# Altium PCB DCcom0038.PcbDoc
Units mm, origin at the board's own origin, x right, y up, seen from the top; angles counter-clockwise.
Board outline 20 x 20 mm, 2 copper layers (Top Layer, Bottom Layer), stack 1.021 mm thick; 13 components, 8 nets, 30 pads, 95 vias.
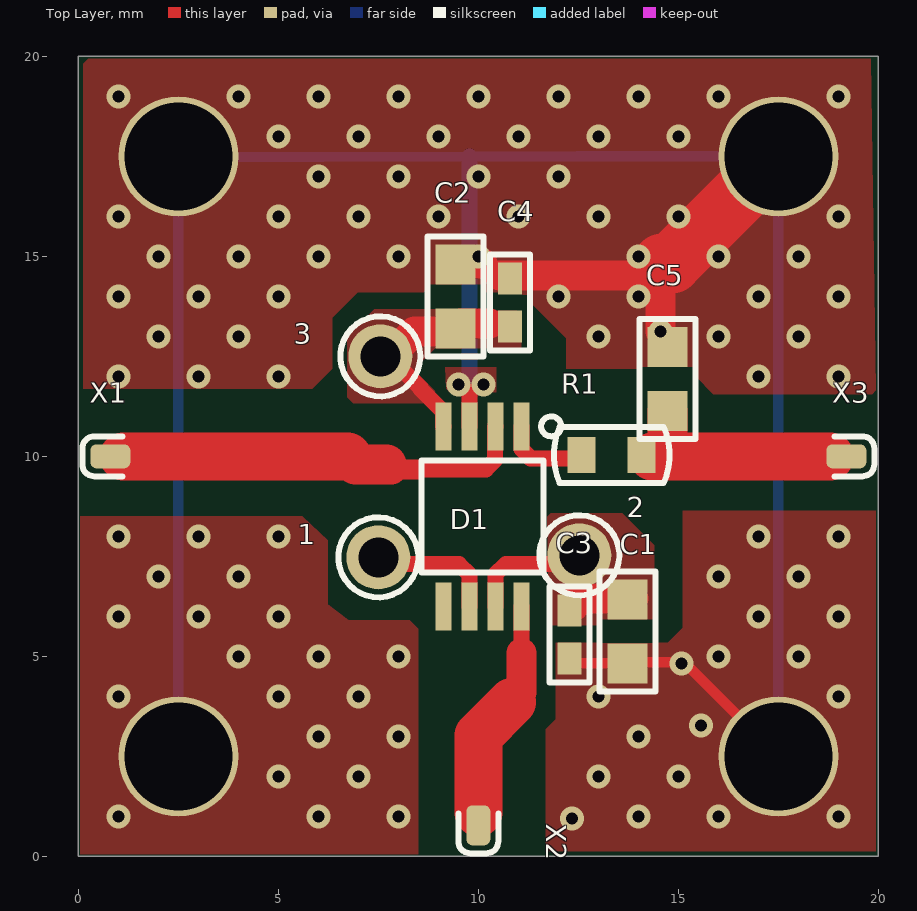
[diagram p0: Top Layer view]
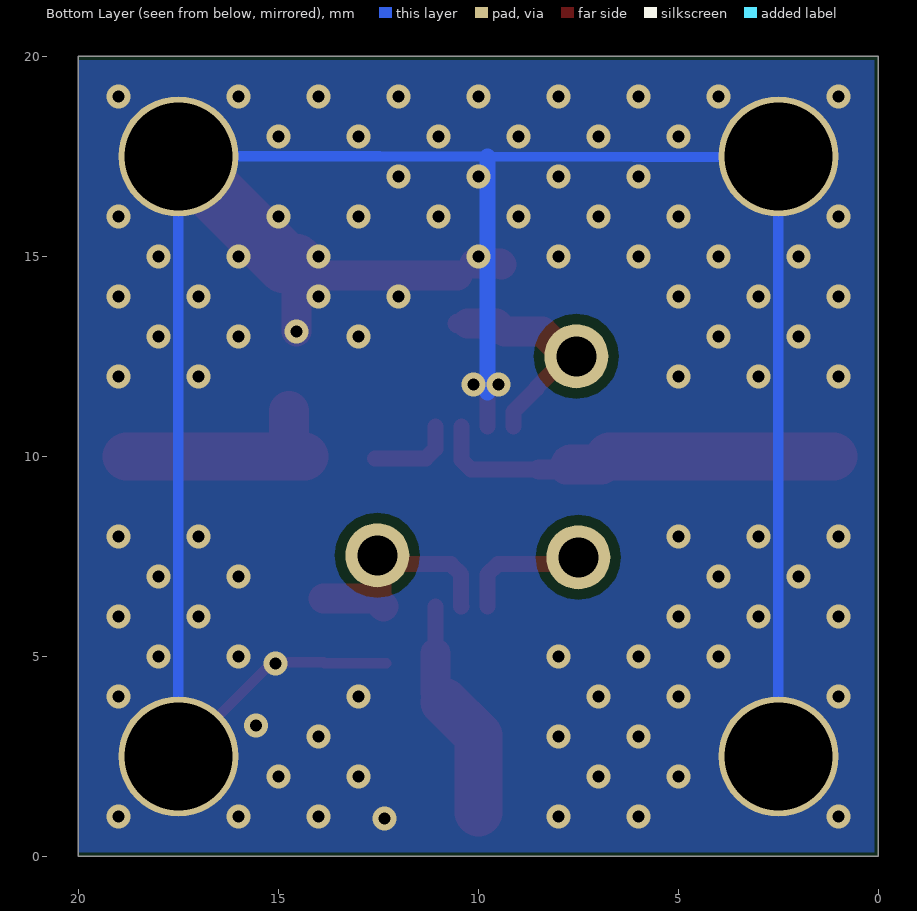
[diagram p1: Bottom Layer view, seen from below]

## Layer stack, top to bottom
Top Solder: solder mask 0.0102, Solder Resist, Dk 3.5
Top Layer: signal copper 0.0356
Dielectric 1: dielectric 0.95, FR-4, Dk 4.8
Bottom Layer: signal copper 0.0356
Bottom Solder: solder mask 0.0102, Solder Resist, Dk 3.5

## Board outline
0,0 0,20 20,20 20,0

## Design rules (kind name [scope] priority, off if disabled: settings)
AssemblyTestPointUsage AssemblyTestPointUsage_1 [All] p2:
AssemblyTestpoint AssemblyTestpoint_1 [All] p2: testpointundercomponent=TRUE minsize=1.016 maxsize=2.54 preferedsize=1.524 minholesize=0 maxholesize=1.016 preferedholesize=0.813 testpointgrid=0.025 usegrid=TRUE gridtolerance=0 allowsidetop=TRUE allowsidebottom=TRUE
Clearance [All] p1: gap=0.254 ignorepadtopadclearanceinfootprint=FALSE except(0: Arc-Hole Track-Hole SMDPad-Hole THPad-Hole Via-Hole Fill-Hole Poly-Hole Region-Hole Text-Hole; 0.127: SMDPad-SMDPad)
Clearance Clearance_1 [All] p2: gap=0.254 ignorepadtopadclearanceinfootprint=FALSE except(0: Arc-Hole Track-Hole SMDPad-Hole THPad-Hole Via-Hole Fill-Hole Poly-Hole Region-Hole Text-Hole; 0.1: SMDPad-Poly SMDPad-Region THPad-Poly THPad-Region; 0.15: Track-Track Track-SMDPad SMDPad-SMDPad SMDPad-THPad SMDPad-Via THPad-THPad)
ComponentClearance ComponentClearance_1 [All] p2: gap=0.254 collisioncheckmode=3 verticalgap=0.254 showdistances=FALSE
DiffPairsRouting [All] p1: maxlimit=0.254 minlimit=0.254 mostfreqgap=0.254 substack1={E3139BEB-1D26-4D56-B641-86937DF22D5B} toplayer_{e3139beb-1d26-4d56-b641-86937df22d5b}_minwidth=0.381 toplayer_{e3139beb-1d26-4d56-b641-86937df22d5b}_maxwidth=0.381 toplayer_{e3139beb-1d26-4d56-b641-86937df22d5b}_prefwidth=0.381 bottomlayer_{e3139beb-1d26-4d56-b641-86937df22d5b}_minwidth=0.381 bottomlayer_{e3139beb-1d26-4d56-b641-86937df22d5b}_maxwidth=0.381 bottomlayer_{e3139beb-1d26-4d56-b641-86937df22d5b}_prefwidth=0.381 toplayer_minwidth=0.381 toplayer_maxwidth=0.381 toplayer_prefwidth=0.381 bottomlayer_minwidth=0.381 bottomlayer_maxwidth=0.381 bottomlayer_prefwidth=0.381 maxuncoupledlength=12.7
DiffPairsRouting DiffPairsRouting_1 [All] p2: maxlimit=0.254 minlimit=0.254 mostfreqgap=0.254 substack1={E3139BEB-1D26-4D56-B641-86937DF22D5B} toplayer_{e3139beb-1d26-4d56-b641-86937df22d5b}_minwidth=0.381 toplayer_{e3139beb-1d26-4d56-b641-86937df22d5b}_maxwidth=0.381 toplayer_{e3139beb-1d26-4d56-b641-86937df22d5b}_prefwidth=0.381 bottomlayer_{e3139beb-1d26-4d56-b641-86937df22d5b}_minwidth=0.381 bottomlayer_{e3139beb-1d26-4d56-b641-86937df22d5b}_maxwidth=0.381 bottomlayer_{e3139beb-1d26-4d56-b641-86937df22d5b}_prefwidth=0.381 toplayer_minwidth=0.381 toplayer_maxwidth=0.381 toplayer_prefwidth=0.381 bottomlayer_minwidth=0.381 bottomlayer_maxwidth=0.381 bottomlayer_prefwidth=0.381 maxuncoupledlength=12.7
FabricationTestPointUsage FabricationTestPointUsage_1 [All] p2: valid=0 allowmultiple=FALSE
FabricationTestpoint FabricationTestpoint_1 [All] p2: side=3 testpointundercomponent=TRUE minsize=1.016 maxsize=2.54 preferedsize=1.524 minholesize=0 maxholesize=1.016 preferedholesize=0.813 testpointgrid=0.025 allowsidetop=TRUE allowsidebottom=TRUE usegrid=TRUE gridtolerance=0
FanoutControl Fanout_LCC [IsLCC] p1: bgadir=Out bgaviamode=Centered fanoutstyle=Auto fanoutdirection=Alternating viagrid=0.025 // Fanout_LCC (Default Rule)
FanoutControl Fanout_BGA [IsBGA] p2: bgadir=Out bgaviamode=Centered fanoutstyle=Auto fanoutdirection=Alternating viagrid=0.025 // Fanout_BGA (Default Rule)
FanoutControl Fanout_Small [(CompPinCount < 5)] p3: bgadir=Out bgaviamode=Centered fanoutstyle=Auto fanoutdirection=OutThenIn viagrid=0.025 // Fanout_Small (Default Rule)
FanoutControl Fanout_SOIC [IsSOIC] p4: bgadir=Out bgaviamode=Centered fanoutstyle=Auto fanoutdirection=Alternating viagrid=0.025 // Fanout_SOIC (Default Rule)
FanoutControl Fanout_BGA_1 [IsBGA] p6: bgadir=Out bgaviamode=Centered fanoutstyle=Auto fanoutdirection=Alternating viagrid=0.025 // Fanout_BGA (Default Rule)
FanoutControl Fanout_LCC_1 [IsLCC] p7: bgadir=Out bgaviamode=Centered fanoutstyle=Auto fanoutdirection=Alternating viagrid=0.025 // Fanout_LCC (Default Rule)
FanoutControl Fanout_SOIC_1 [IsSOIC] p8: bgadir=Out bgaviamode=Centered fanoutstyle=Auto fanoutdirection=Alternating viagrid=0.025 // Fanout_SOIC (Default Rule)
FanoutControl Fanout_Small_1 [(CompPinCount < 5)] p9: bgadir=Out bgaviamode=Centered fanoutstyle=Auto fanoutdirection=OutThenIn viagrid=0.025 // Fanout_Small (Default Rule)
FanoutControl Fanout_Default_1 [All] p10: bgadir=Out bgaviamode=Centered fanoutstyle=Auto fanoutdirection=Alternating viagrid=0.025 // Fanout_Default (Default Rule)
Height Height_1 [All] p2: minheight=0 maxheight=25.4 prefheight=12.7
HoleSize HoleSize_1 [All] p2: absolutevalues=TRUE maxlimit=2.54 minlimit=0.025 maxpercent=80.000 minpercent=20.000
HoleToHoleClearance HoleToHoleClearance_1 [All] p2: gap=0.254 allowstackedmicrovias=TRUE
LayerPairs LayerPairs_1 [All] p2: enforce=TRUE
MinimumSolderMaskSliver MinimumSolderMaskSliver_1 [All] p2: minsoldermaskwidth=0.254
NetAntennae NetAntennae_1 [All] p2: netantennaetolerance=0
PasteMaskExpansion PasteMaskExpansion_1 [All] p2: expansion=0
PlaneClearance PlaneClearance_1 [All] p2: clearance=0.8
PlaneConnect [All] p1: planeconnectstyle=Direct reliefexpansion=0.508 reliefentries=4 reliefconductorwidth=0.254 reliefairgap=0.254
PlaneConnect PlaneConnect_1 [All] p2: planeconnectstyle=Direct reliefexpansion=0.508 reliefentries=4 reliefconductorwidth=0.254 reliefairgap=0.254
PolygonConnect [All] p1: connectstyle=Direct reliefconductorwidth=0.254 reliefentries=4 polygonreliefangle="90 Angle" airgapwidth=0.254
PolygonConnect PolygonConnect_1 [All] p2: connectstyle=Direct reliefconductorwidth=0.254 reliefentries=4 polygonreliefangle="90 Angle" airgapwidth=0.254
RoutingCorners RoutingCorners_1 [All] p2: cornerstyle=45-Degree minsetback=2.54 maxsetback=2.54
RoutingLayers RoutingLayers_1 [All] p2: top layer_v5=TRUE bottom layer_v5=TRUE
RoutingPriority RoutingPriority_1 [All] p2: routingpriority=0
RoutingTopology RoutingTopology_1 [All] p2: topology=Shortest
RoutingVias [All] p1: holewidth=0.711 width=1.27 viastyle="Through Hole" minholewidth=0.711 minwidth=1.27 maxholewidth=0.711 maxwidth=1.27
RoutingVias RoutingVias_1 [All] p2: holewidth=0.711 width=1.27 viastyle="Through Hole" minholewidth=0.711 minwidth=1.27 maxholewidth=0.711 maxwidth=1.27
ShortCircuit ShortCircuit_1 [All] p2: allowed=FALSE
SilkToBoardRegionClearance SilkToBoardRegionClearance_1 [All] p2:
SilkToSilkClearance SilkToSilkClearance_1 [All] p2: silktosilkclearance=0.254
SilkToSolderMaskClearance SilkToSolderMaskClearance_1 [IsPad] p2: minsilkscreentomaskgap=0.254 clearancetoexposedcopper=TRUE
SolderMaskExpansion [All] p1: expansion=0.102 istentingtop=FALSE
SolderMaskExpansion SolderMaskExpansion_1 [All] p2: expansion=0.102 istentingtop=FALSE
UnRoutedNet UnRoutedNet_1 [All] p2:
UnpouredPolygon UnpouredPolygon_1 [All] p2:
Width [All] p1: maxlimit=1.5 minlimit=0.254 preferedwidth=0.4 substack1={E3139BEB-1D26-4D56-B641-86937DF22D5B} toplayer_{e3139beb-1d26-4d56-b641-86937df22d5b}_maxwidth=0.254 toplayer_{e3139beb-1d26-4d56-b641-86937df22d5b}_prefwidth=0.254 bottomlayer_{e3139beb-1d26-4d56-b641-86937df22d5b}_maxwidth=0.254 bottomlayer_{e3139beb-1d26-4d56-b641-86937df22d5b}_prefwidth=0.254
Width Width_08 [All] p2: maxlimit=0.8 minlimit=0.8 preferedwidth=0.8 substack1={E3139BEB-1D26-4D56-B641-86937DF22D5B}
Width Width_1 [All] p3: maxlimit=0.54 minlimit=0.254 preferedwidth=0.4 substack1={E3139BEB-1D26-4D56-B641-86937DF22D5B} toplayer_{e3139beb-1d26-4d56-b641-86937df22d5b}_maxwidth=0.254 toplayer_{e3139beb-1d26-4d56-b641-86937df22d5b}_prefwidth=0.254 bottomlayer_{e3139beb-1d26-4d56-b641-86937df22d5b}_maxwidth=0.254 bottomlayer_{e3139beb-1d26-4d56-b641-86937df22d5b}_prefwidth=0.254 checkconnectedcopper=TRUE
24 further rules are at their usual default settings.

## Components (designator, comment, footprint, x,y, rotation, side; value= is the part's Value field where it differs from the comment)
1 "TP" TP1 7.5,7.475 r90 top
2 "TP" TP1 12.525,7.525 r90 top
3 "TP" TP1 7.55,12.5 r90 top
C1 "0,1 мк" CAPC1608N 13.725,5.625 r90 top value={Value}
C2 "0,1 мк" CAPC1608N 9.425,14 r270 top value={Value}
C3 "100" CAPC1005N 12.275,5.55 r270 top value={Value}
C4 "100" CAPC1005N 10.795,13.843 r90 top value={Value}
C5 "10" CAPC1608N 14.732,11.938 r270 top value={Value}
D1 "ADG619BRM" TSOP65P490X110-8N 10.1,8.5 r270 top
R1 "1к" RESC1608L 13.335,10.033 r180 top value={Value}
X1 "СРГ-50-751ФВ" TP0.6X1 0.8,10 r180 top
X2 "СРГ-50-751ФВ" TP0.6X1 10,0.775 r270 top
X3 "СРГ-50-751ФВ" TP0.6X1 19.2,10 r0 top

## Footprints (in the part's own frame and the unit in brackets; to place one, negate y for a bottom-side part, rotate by r counter-clockwise, add the part's x,y. Pads: shape width x height; smd on the part's side, far side on the other; paste and mask are expansions set on the pad)
CAPC1005N [mm] "Chip Capacitor, Body 1.0x0.5mm, IPC Medium Density"
  rect 0.8x0.6 smd: 1(-0.6,0) 2(0.6,0)
  Top Layer pour cut-out: -0.2,0.5 -0.2,-0.5 0.2,-0.5 0.2,0.5
  silkscreen extent -1.2,-0.5 1.2,0.5, body extent -0.55,-0.3 0.55,0.3, height 0.6
CAPC1608N [mm] "Chip Capacitor, Body 1.6x0.8mm, IPC Medium Density"
  rect 1x1 smd: 1(-0.8,0) 2(0.8,0)
  Top Layer pour cut-out: -0.3,0.7 -0.3,-0.7 0.3,-0.7 0.3,0.7
  silkscreen extent -1.5,-0.7 1.5,0.7, body extent -0.87,-0.48 0.87,0.48, height 0.85
RESC1608L [mm] "Chip Resistor, Body 1.6x0.8mm, IPC High Density"
  rect 0.7x0.9 smd: 1(-0.75,0) 2(0.75,0)
  Top Layer pour cut-out: -0.4,0.7 -0.4,-0.7 0.4,-0.7 0.4,0.7
  silkscreen extent -1.45,-0.7 1.45,0.7, body extent -0.85,-0.48 0.85,0.48, height 0.6
TP0.6X1 [mm] "Точка пайки переход СРГ-50-751 (плата заштифтована)"
  rrect50% 1x0.6 smd paste-25.4: 1(0,0)
  silkscreen extent -0.3,-0.5 0.7,0.5
TP1 [mm] "Test point 1x1.6"
  round 1.6 hole 1 paste+0: 1(0,0)
  silkscreen extent -1,-1 1,1
TSOP65P490X110-8N [mm] "Shrink Small Outline; 8 Leads; Body Width 3 mm; Pitch 0.65 mm"
  rect 1.2x0.4 smd mask+0.05: 1(-2.25,0.975) 2(-2.25,0.325) 3(-2.25,-0.325) 4(-2.25,-0.975) 5(2.25,-0.975) 6(2.25,-0.325) 7(2.25,0.325) 8(2.25,0.975)
  silkscreen extent -2.5,-1.53 1.4,1.97, body extent -2.48,-1.6 2.48,1.6, height 1.25

## Part data
1 2 3: "Test point"
C1 C2 C5: library part C0603, "Чип-конденсатор", Power/Voltage={Voltage}, Tolerance={Tolerance}, Name=0603, TKE/TKC={TKE/TKC}, Type=Конденсатор
C3 C4: library part C0402, "Чип-конденсатор", Power/Voltage={Voltage}, Tolerance={Tolerance}, Name=0402, TKE/TKC={TKE/TKC}, Type=Конденсатор
D1: "Single SPDT Switch", Manufacturer="Analog Devices", Package=RM-8, ManufacturerPartNumber=ADG619BRM, Type=Микросхема
R1: library part R0603, "Чип-резистор", Tolerance={Tolerance}, Name=0603, Type=Резистор
X1 X2 X3: "Переход", ManufacturerPartNumber=СРГ-50-751ФВ, TU/GOST="ВР0.364.049 ТУ", Type=Переход

## Free pads (board coordinates)
  round 3 hole 2.7: 1(2.5,17.5) 2(2.5,2.5) 3(17.5,17.5) 5(17.5,2.5)

## Via types
v1: diameter 0.6, hole 0.3, Top Layer to Bottom Layer, 95 vias

## Nets (pads, with @x,y where several pads share a name; then routed paths per layer and width w, separated by ;. In a path a pad name is that pad's centre, name@x,y a point inside that pad or via, vN(x,y) a via of type N, cw(c..) or ccw(c..) an arc to the next point about the centre after c; other vN are vias at no path point)
GND: C1.1 C2.1 C3.2 C4.2 C5.1 D1.3 pad.1 pad.2 pad.3 pad.5 | length 67.2
  Top Layer w0.254: C3.2@12.3,4.825 13.85,4.825 13.875,4.85 15.15,4.85 pad.5
  Top Layer w0.4: 9.75,11.625 9.75,11.621 9.775,11.596 D1.3
  Top Layer w0.75: C2.1 9.45,14.825 v1@10.1,14.825 ; C4.2@10.525,14.525 14.111,14.525 ; v1(14.55,13.125) 14.55,14.086
  Top Layer w1.5: 14.6,14.825 14.825,14.825 pad.3
  Bottom Layer w0.254: pad.2 pad.1 2.5,17.475 9.775,17.493 12.475,17.5 pad.3 pad.5
  Bottom Layer w0.4: 9.775,11.596 9.775,17.493
  other v1: 12.34,0.945 1,1 6,1 8,1 14,1 16,1 19,1 5,2 7,2 13,2 15,2 6,3 8,3 14,3 15.562,3.271 1,4 5,4 7,4 13,4 19,4 15.075,4.825 4,5 6,5 8,5 16,5 18,5 1,6 3,6 5,6 17,6 19,6 2,7 4,7 16,7 18,7 1,8 3,8 5,8 17,8 19,8 9.5,11.8 10.125,11.8 1,12 3,12 5,12 17,12 19,12 2,13 4,13 13,13 16,13 18,13 1,14 3,14 5,14 12,14 14,14 17,14 19,14 2,15 4,15 6,15 8,15 10,15 14,15 16,15 18,15 1,16 5,16 7,16 9,16 11,16 13,16 15,16 19,16 6,17 8,17 10,17 12,17 5,18 7,18 9,18 11,18 13,18 15,18 1,19 4,19 6,19 8,19 10,19 12,19 14,19 16,19 19,19
Net1_1: 1.1 D1.6 | length 3.2
  Top Layer w0.4: 1.1 7.671,7.304 9.513,7.304 9.771,7.046 9.771,7.029 9.775,7.025 D1.6
Net2_1: 2.1 C1.2 C3.1 D1.7 | length 5.4
  Top Layer w0.4: D1.7 10.429,6.25 10.429,7.046 10.687,7.304 12.304,7.304 12.375,7.233 C3.1@12.375,6.25
  Top Layer w0.75: C3.1@12.375,6.25 12.575,6.45 C1.2@13.875,6.45
Net3_1: 3.1 C2.2 C4.1 D1.4 | length 5.6
  Top Layer w0.4: 3.1 7.766,12.5 8.55,11.716 8.55,11.684 9.121,11.113 9.121,10.75 D1.4
  Top Layer w0.5: 10.275,13.325 C4.1@10.525,13.325
  Top Layer w0.75: 3.1@7.766,12.5 7.78,12.5 8.4,13.12 9.345,13.12 C2.2 9.55,13.325 10.275,13.325
NetC5_2: C5.2 R1.1 X3.1 | length 5.7
  Top Layer w1: R1.1@14.351,10 14.732,10.381 C5.2
  Top Layer w1.2: R1.1@14.351,10 X3.1@18.796,10
NetD1_1: D1.1 R1.2 | length 2.3
  Top Layer w0.254: D1.1 D1.1@11.148,10.677
  Top Layer w0.4: D1.1 11.075,10.184 11.309,9.95 R1.2@12.585,9.95
NetD1_2: D1.2 X1.1 | length 10.4
  Top Layer w0.4: 8.5,9.675 10.187,9.675 10.421,9.909 10.421,10.75 D1.2
  Top Layer w0.5: 7.825,9.675 8.5,9.675
  Top Layer w0.75: 7.7,9.8 7.825,9.675
  Top Layer w1: 6.725,10 6.925,9.8 7.7,9.8
  Top Layer w1.2: X1.1@1.125,10 6.725,10
NetD1_8: D1.8 X2.1 | length 5.3
  Top Layer w0.4: 11.075,5.08 D1.8
  Top Layer w0.75: 11.075,4.09 11.075,5.08
  Top Layer w1.2: X2.1@10,1.1 10,3.015 10.841,3.856
pads on no net: D1.5

## Polygon pours and split planes (outlines as drawn)
Net3_1 on Top Layer "NET3_1_L01_P012" (solid, remove dead copper, pour order 12): 6.725,13 7.4,13.675 11.05,13.675 11.1,13.625 11.075,13.6 11.075,12.7 8.925,12.7 8.475,12.25 8.475,12.075 8.925,11.625 8.625,11.325 6.875,11.325 6.725,11.475 6.725,11.525
Net2_1 on Top Layer "NET2_1_L01_P011" (solid, remove dead copper, pour order 11): 11.775,5.75 11.8,5.775 14.4,5.775 14.4,7.775 13.6,8.575 11.725,8.575
GND on Top Layer "GND_L01_P010" (solid, remove dead copper, pour order 10): 19.939,11.557 15.875,11.557 15.24,12.192 12.192,12.192 12.192,12.958 11.025,14.125 10.997,14.097 6.985,14.097 6.35,13.462 6.35,12.192 5.842,11.684 0.127,11.684 0.127,19.812 0.254,19.939 19.812,19.939
GND on Top Layer "GND_L01_P009" (solid, remove dead copper, pour order 9): 11.684,0.127 11.684,3.175 11.938,3.429 11.938,4.445 11.938,5.334 14.732,5.334 15.113,5.715 15.113,8.636 19.939,8.636 19.939,0.127
GND on Top Layer "GND_L01_P008" (solid, remove dead copper, pour order 8): 0.05,8.5 2.8,8.5 5.6,8.5 6.235,7.9 6.235,6.3 6.766,5.9 8.285,5.9 8.5,5.685 8.5,1.394 8.5,0.05 0.05,0.05
GND on Top Layer "GND_L01_P007" (solid, pour order 7): 9.175,12.225 9.387,12.225 10.45,12.225 10.45,11.55 10.4,11.5 9.2,11.5
GND on Bottom Layer "Bottom Layer-No Net" (solid, pour order 6): 0.1,19.9 0.1,0.1 20,0.1 20,19.9

## Silkscreen, mask and mechanical layers (free items; w line width, h text height)
Top Solder:
  region: 19.975,17.025 19.975,20.025 -0.025,20.025 -0.025,17.025
  region: 0,2.95 0,-0.05 20,-0.05 20,2.95
  region: 3,20 0,20 0,0 3,0
  region: 5.5,20 2.5,20 2.5,14.5 5.5,14.5
  region: 5.5,5.5 2.5,5.5 2.5,0 5.5,0
  rectangle: 14.5,14.5 17.5,20
  rectangle: 14.5,0 17.5,5.5
  rectangle: 17,0 20,20
  region: 11.925,7.463 14.275,7.462 14.275,3.862 12.15,3.862 11.925,4.087
Bottom Solder:
  rectangle: 0.1,0.1 19.925,19.975
Mechanical 3:
  lines w0.05: 0.1,0.1 0.1,19.9
Mechanical 4:
  lines w0.254: 0.1,0.1 0.1,19.9 19.9,19.9 19.9,0.1 0.1,0.1
Mechanical 5:
  circle w0.254: c12.5,7.5 r1.25
  circle w0.254: c7.5,7.5 r1.25
  circle w0.254: c12.5,12.5 r1.25
  circle w0.254: c12.5,17.5 r1.25
  circle w0.254: c7.5,2.5 r1.25
  circle w0.254: c7.5,12.5 r1.25
  circle w0.254: c7.5,17.5 r1.25
  circle w0.254: c12.5,2.5 r1.25
  circle w0.254: c2.5,7.5 r1.25
  circle w0.254: c2.5,2.5 r1.25
  circle w0.254: c2.5,17.5 r1.25
  circle w0.254: c17.5,12.5 r1.25
  circle w0.254: c17.5,7.5 r1.25
  circle w0.254: c17.5,2.5 r1.25
  circle w0.254: c17.5,17.5 r1.25
  circle w0.254: c2.5,12.5 r1.25